# Altium PCB PCB_Add.PcbDoc
Units mm, origin at the board's own origin, x right, y up, seen from the top; angles counter-clockwise.
Board outline 29.72 x 33.27 mm, 2 copper layers (Top Layer, Bottom Layer); 13 components, 6 nets, 39 pads, 0 vias.
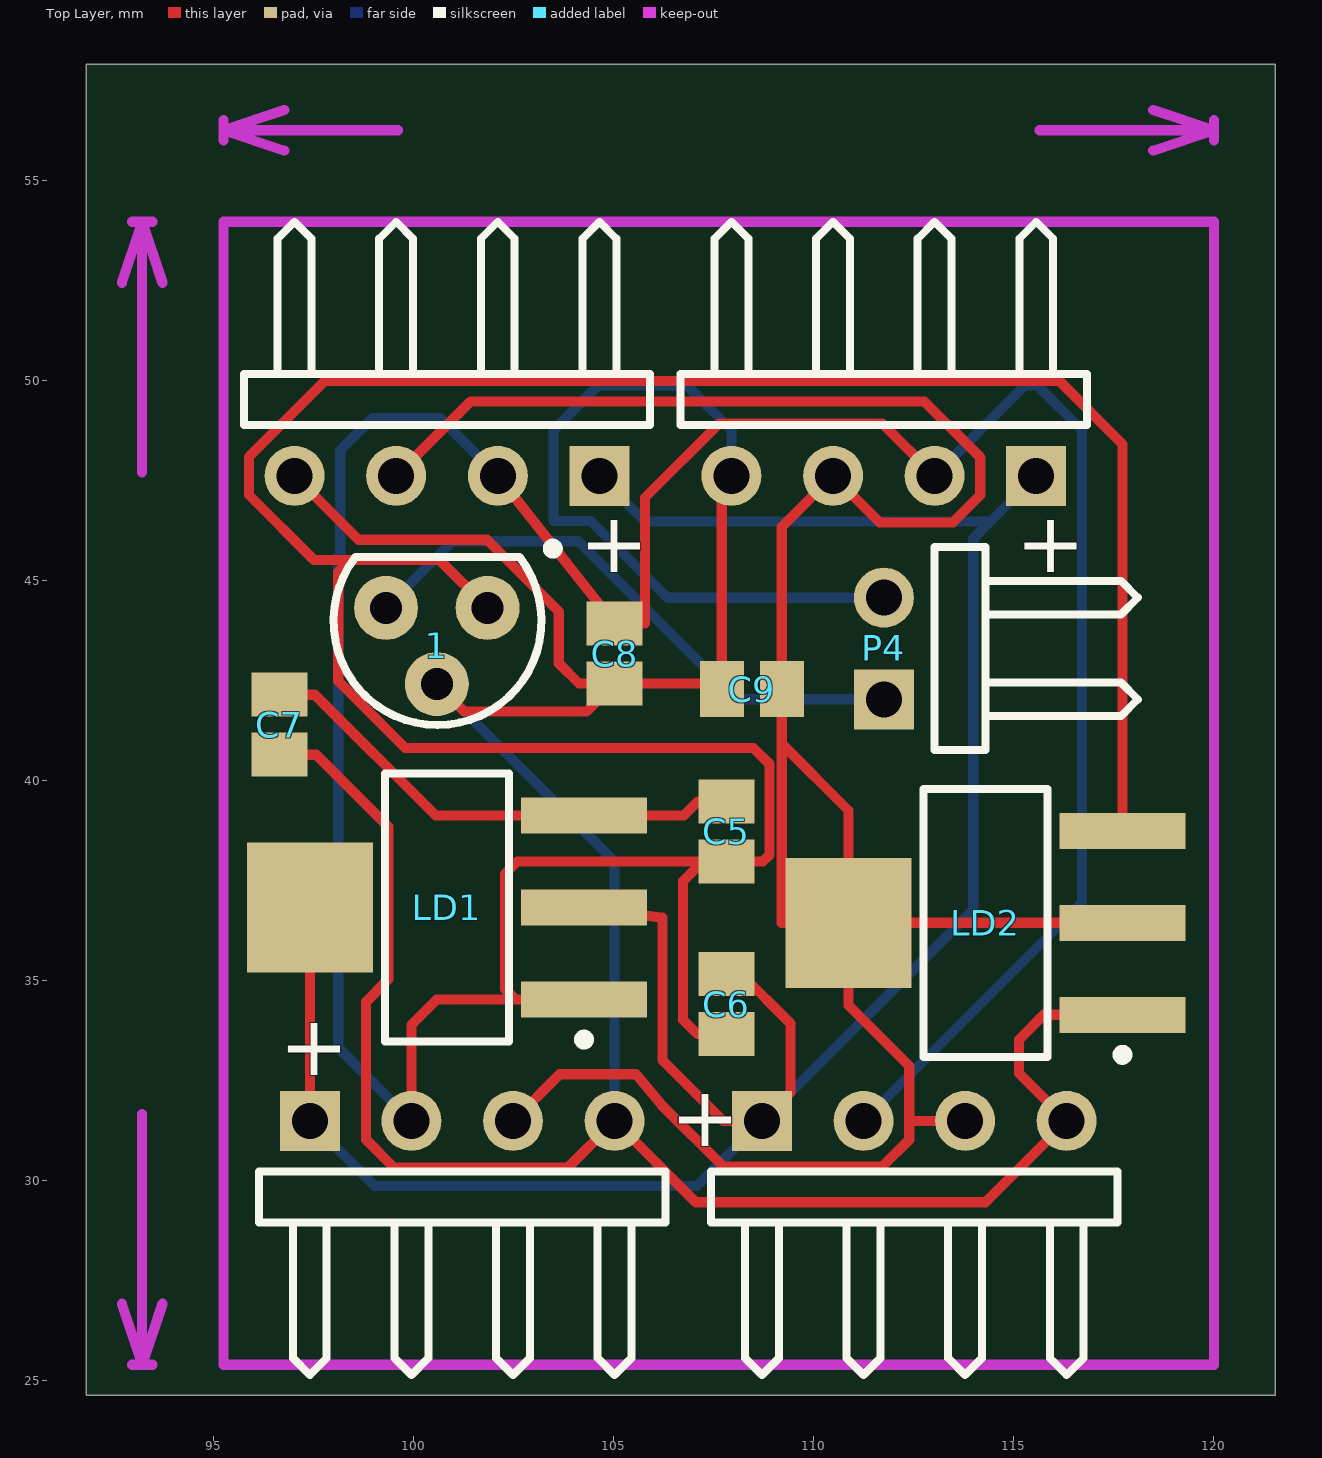
[diagram p0: Top Layer view]
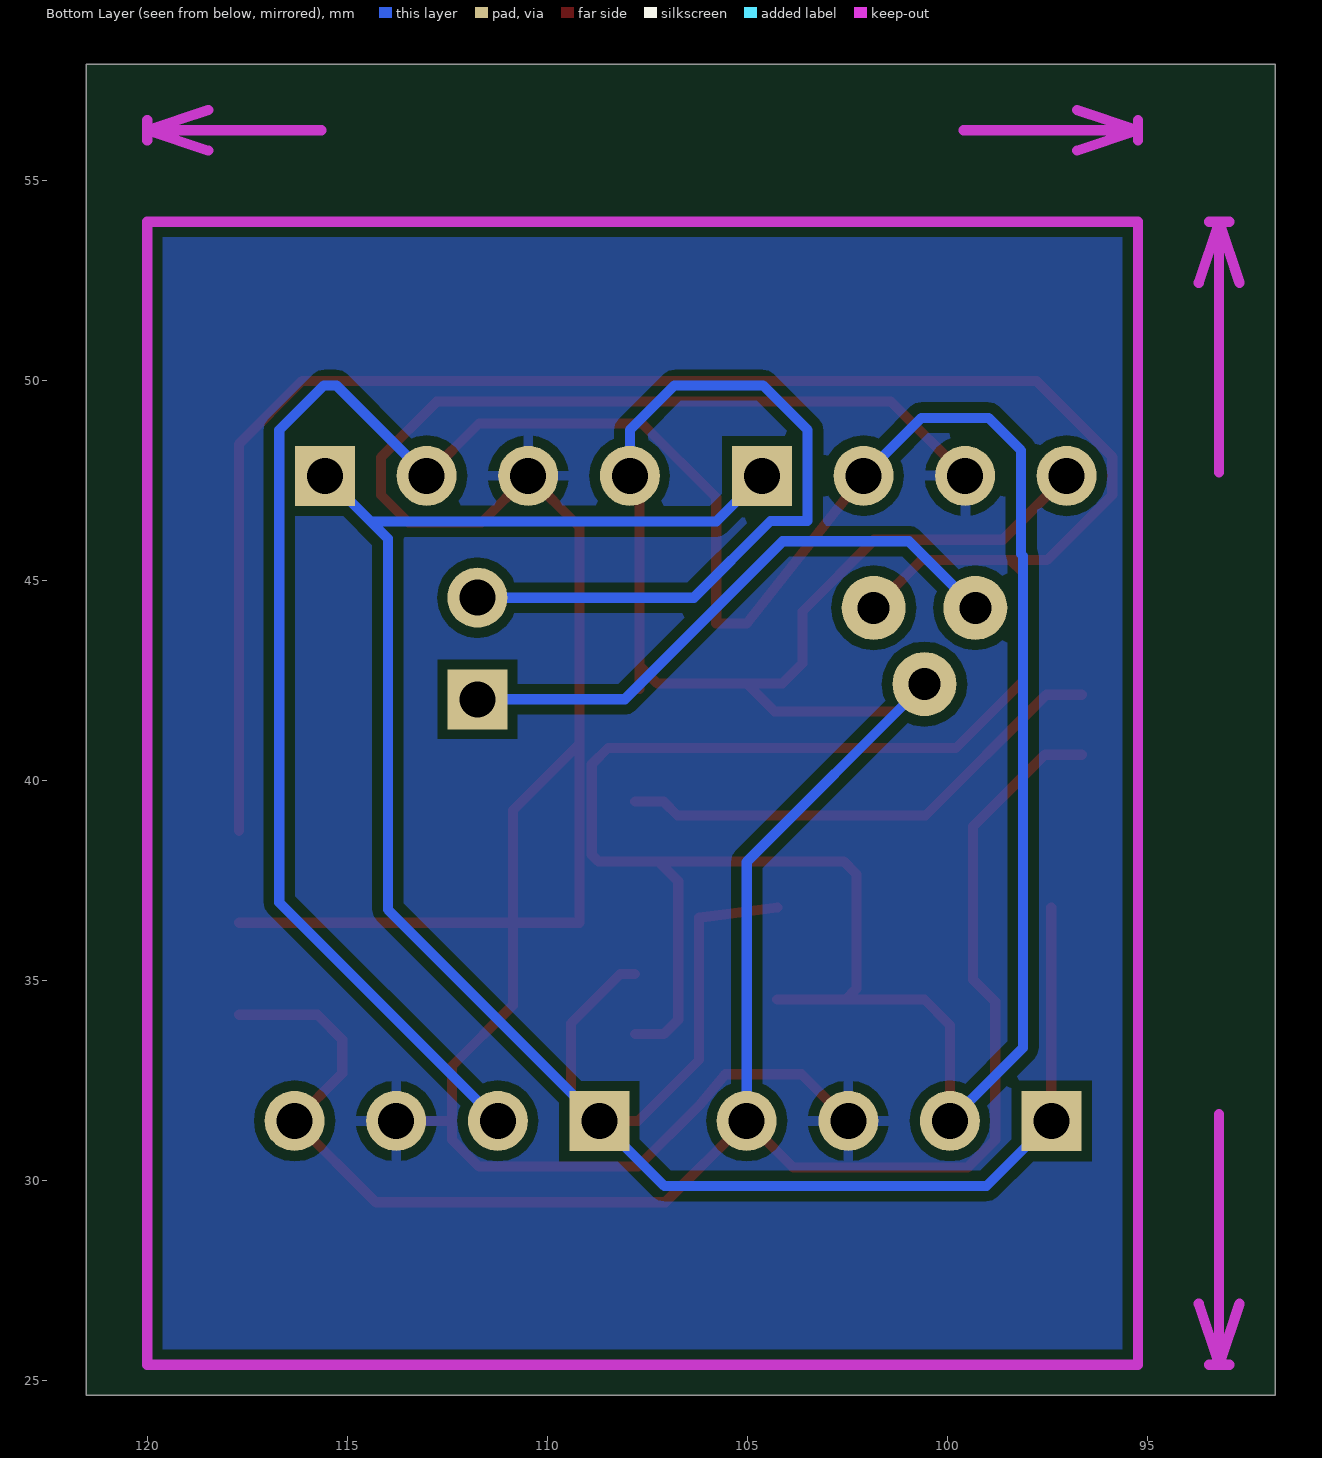
[diagram p1: Bottom Layer view, seen from below]

## Layer stack, top to bottom
Top Solder: solder mask 0.0102, Solder Resist, Dk 3.5
Top Layer: signal copper 0.0356
Dielectric 1: dielectric 0.32, FR-4, Dk 4.8
Bottom Layer: signal copper 0.0356
Bottom Solder: solder mask 0.0102, Solder Resist, Dk 3.5

## Board outline
91.821,24.638 91.821,57.912 121.539,57.912 121.539,24.638

## Design rules (kind name [scope] priority, off if disabled: settings)
Clearance [All] p1: gap=0.254
PolygonConnect [All] p1: connectstyle=Relief reliefconductorwidth=0.254 reliefentries=4 polygonreliefangle="90 Angle" airgapwidth=0.254
RoomDefinition Sch_Add [InComponentClass('Sch_Add')] p1: confinementstyle=ConfineIn formatcopy=TRUE lockcomponents=FALSE outline 0,0 50.8,0 50.8,25.4 0,25.4
RoutingVias [All] p1: holewidth=0.711 width=1.27 viastyle="Through Hole" minholewidth=0.711 minwidth=1.27 maxholewidth=0.711 maxwidth=1.27
SolderMaskExpansion [All] p1: expansion=0.102
Width [All] p1: maxlimit=0.254 minlimit=0.254 preferedwidth=0.254
30 further rules are at their usual default settings.

## Components (designator, comment, footprint, x,y, rotation, side; value= is the part's Value field where it differs from the comment)
1 "7805" TO-92 100.457,43.942 r90 top
+ "Header 4H" HDR1X4H 108.712,31.496 r0 top (schematic designator P5)
+ "Header 4H" HDR1X4H 104.648,47.625 r180 top (schematic designator P9)
+ "Header 4H" HDR1X4H 97.409,31.496 r0 top (schematic designator P7)
+ "Header 4H" HDR1X4H 115.57,47.625 r180 top (schematic designator P8)
C5 "Cap Pol3" C0805 107.823,38.735 r270 top
C6 "Cap Pol3" C0805 107.823,34.417 r270 top
C7 "Cap Pol3" C0805 96.647,41.402 r270 top
C8 "Cap Pol3" C0805 105.029,43.18 r270 top
C9 "Cap Pol3" C0805 108.458,42.291 r180 top
LD1 "LD1117" SOT230P700X180-4N 100.838,36.83 r180 top
LD2 "LD1117" SOT230P700X180-4N 114.3,36.449 r180 top
P4 "Header 2H" HDR1X2H 111.76,42.037 r90 top

## Footprints (in the part's own frame and the unit in brackets; to place one, negate y for a bottom-side part, rotate by r counter-clockwise, add the part's x,y. Pads: shape width x height; smd on the part's side, far side on the other; paste and mask are expansions set on the pad)
C0805 [mm] "Chip Capacitor, Body 2.0x1.3mm, IPC High Density"
  rect 1.1x1.4 smd: 1(-0.75,0) 2(0.75,0)
  body extent -1.1,-0.72 1.1,0.72, height 1.4
HDR1X2H [mm] "Connector; Header; 2 Position; Right Angle"
  rect 1.5x1.5 hole 0.9: 1(0,0)
  round 1.5 hole 0.9: 2(2.54,0)
  silkscreen extent -1.27,-6.35 3.81,-1.27
HDR1X4H [mm] "Connector; Header; 4 Position; Right Angle"
  rect 1.5x1.5 hole 0.9: 1(0,0)
  round 1.5 hole 0.9: 2(2.54,0) 3(5.08,0) 4(7.62,0)
  silkscreen extent -1.27,-6.35 8.89,-1.27
SOT230P700X180-4N [mm] "SOT223, 4-Leads, Body 6.50x7.00mm (avg), Pitch 2.30mm, IPC Medium Density"
  rect 3.15x0.9 smd: 1(-3.425,2.3) 2(-3.425,0) 3(-3.425,-2.3)
  rect 3.15x3.25 smd: 4(3.425,0)
  silkscreen extent -3.55,-3.35 1.55,3.42, body extent -1.85,-3.35 1.85,3.35, height 1.8
TO-92 [mm]
  round 1.6 hole 0.8: 1(0.381,-1.397) 2(-1.524,-0.127) 3(0.381,1.143)
  silkscreen extent -2.55,-3.15 1.99,2.46, body extent -2.55,-2.75 1.65,2.47, height 5.2

## Part data
+ + + +: "Header, 4-Pin, Right Angle"
C5 C6 C7 C8 C9: "Polarized Capacitor (Surface Mount)"
P4: "Header, 2-Pin, Right Angle"

## Nets (pads, with @x,y where several pads share a name; then routed paths per layer and width w, separated by ;. In a path a pad name is that pad's centre, name@x,y a point inside that pad or via, vN(x,y) a via of type N, cw(c..) or ccw(c..) an arc to the next point about the centre after c; other vN are vias at no path point)
NetC5_1: C5.1 C7.1 LD1.3 | length 12.6
  Top Layer w0.254: C7.1 97.536,42.152 100.558,39.13 LD1.3 106.757,39.13 107.112,39.485 C5.1
P+2.5V: 1.1 +.2 C5.2 C6.2 C8.1 LD1.1 LD2.3 | length 188.7
  Top Layer w0.254: +.2@99.949,31.496 99.949,33.895 100.584,34.53 102.554,34.53 ; 1.1 100.66,45.517 ; +.2@102.108,47.625 C8.1 105.791,43.93 ; LD1.1 102.554,34.53 ; +.2@113.03,47.625 111.722,48.933 107.644,48.933 105.791,47.08 ; 95.891,48.097 97.791,49.997 ; 95.891,48.097 95.891,47.146 97.52,45.517 ; 95.891,48.097 97.791,49.997 ; 97.52,45.517 100.66,45.517 ; 97.52,45.517 98.425,45.517 ; 97.791,49.997 116.144,49.997 ; 97.791,49.997 116.144,49.997 ; 98.425,45.517 100.66,45.517 ; 98.425,45.517 98.12,45.212 98.12,42.494 99.797,40.818 108.498,40.818 108.904,40.411 108.904,38.152 108.737,37.985 C5.2 ; 102.554,34.53 102.286,34.798 102.286,37.668 102.603,37.985 C5.2@107.239,37.985 ; 105.791,43.93 105.791,47.08 ; 105.791,43.93 105.791,47.08 ; 106.741,34.026 106.741,37.487 ; 106.741,34.026 107.1,33.667 ; 106.741,34.026 106.741,37.487 ; 106.741,37.487 C5.2@107.239,37.985 ; 107.1,33.667 C6.2 107.1,33.667 ; C5.2@107.239,37.985 C5.2 ; C5.2@107.239,37.985 C5.2 ; 116.144,49.997 117.725,48.416 ; 116.144,49.997 117.725,48.416 ; 117.725,48.416 LD2.3 117.725,48.416
  Bottom Layer w0.254: +.2@99.949,31.496 98.12,33.325 98.12,45.618 98.171,45.669 98.171,48.26 98.984,49.073 100.66,49.073 +.2@102.108,47.625 ; +.2@111.252,31.496 116.713,36.957 116.713,48.768 115.595,49.886 115.291,49.886 +.2@113.03,47.625
P+5V: +.1 C6.1 LD1.2 LD1.4 | length 60.7
  Top Layer w0.254: +.1@97.409,31.496 97.413,31.5 LD1.4 ; LD1.2 106.223,36.576 106.223,33.02 107.747,31.496 108.712,31.496 109.423,32.207 109.423,33.934 108.191,35.167 C6.1
  Bottom Layer w0.254: +.1@97.409,31.496 99.035,29.87 107.086,29.87 108.712,31.496 113.995,36.779 113.995,46.05 114.427,46.482 ; +.1@104.648,47.625 105.791,46.482 114.427,46.482 ; +.1@115.57,47.625 114.427,46.482
P+9V: 1.3 P4.1 | length 14.8
  Bottom Layer w0.254: 1.3 100.977,45.986 104.128,45.986 108.077,42.037 P4.1
P-2.5V: 1.2 +.4 C7.2 C8.2 C9.2 LD2.1 P4.2 | length 92.3
  Top Layer w0.254: C7.2 97.574,40.652 99.373,38.853 99.373,35.035 98.817,34.478 98.817,31.024 99.513,30.328 103.861,30.328 105.029,31.496 107.061,29.464 114.3,29.464 116.332,31.496 115.138,32.69 115.138,33.528 115.759,34.149 LD2.1 ; +.4@97.028,47.625 98.628,46.025 101.841,46.025 103.632,44.233 103.632,42.938 104.14,42.43 C8.2 ; 1.2 101.272,41.73 104.329,41.73 C8.2 ; C9.2 C9.2@107.708,42.875 ; +.4@107.95,47.625 107.708,47.383 C9.2@107.708,42.875 ; C8.2 C9.2@107.263,42.43 ; C9.2@107.263,42.43 C9.2@107.708,42.875 ; C9.2@107.263,42.43 107.416,42.583 C9.2@107.708,42.875
  Bottom Layer w0.254: 1.2 105.029,37.973 +.4@105.029,31.496 ; +.4@107.95,47.625 107.95,48.768 106.832,49.886 104.623,49.886 103.505,48.768 103.505,46.494 104.433,46.494 106.35,44.577 P4.2
PGND: +.3 C9.1 LD2.2 LD2.4 | length 71.7
  Top Layer w0.254: +.3@99.568,47.625 101.422,49.479 112.776,49.479 114.171,48.084 114.171,47.144 113.484,46.457 111.658,46.457 110.49,47.625 109.208,46.343 C9.1 ; +.3@102.489,31.496 103.657,32.664 105.562,32.664 105.588,32.639 106.197,31.902 107.745,30.355 111.724,30.355 112.395,31.026 112.395,31.496 ; +.3@113.792,31.496 112.395,31.496 ; LD2.2 LD2.4 ; 109.208,36.449 C9.1 ; 109.208,36.449 109.208,40.924 ; 109.208,36.449 LD2.4 ; 109.208,40.924 C9.1 ; 109.208,40.924 110.875,39.257 LD2.4 ; LD2.4 110.875,34.388 112.395,32.868 112.395,31.496

## Polygon pours and split planes (outlines as drawn)
PGND on Bottom Layer "PGND" (solid, pour order 1): 95.377,25.527 119.888,25.527 119.888,53.848 95.377,53.848

## Keep-outs
Keep-Out Layer:
  lines w0.254: 92.71,26.924 93.218,25.4 ; 92.71,52.451 93.218,53.975 ; 92.964,25.4 93.472,25.4 ; 92.964,53.975 93.472,53.975 ; 93.218,31.664 93.218,25.4 ; 93.218,47.711 93.218,53.975 ; 93.726,26.924 93.218,25.4 ; 93.726,52.451 93.218,53.975 ; 95.25,56.007 95.25,56.515 ; 96.774,55.753 95.25,56.261 ; 96.774,56.769 95.25,56.261 ; 99.609,56.261 95.25,56.261 ; 115.656,56.261 120.015,56.261 ; 118.491,55.753 120.015,56.261 ; 118.491,56.769 120.015,56.261 ; 120.015,56.007 120.015,56.515 ; 95.25,25.4 95.25,53.975 120.015,53.975 120.015,25.4 95.25,25.4
  text "24.765 (mm)" at 99.863,55.347 h1.52
  text "28.575 (mm)" at 94.132,31.918 h1.52 r90

## Silkscreen, mask and mechanical layers (free items; w line width, h text height)
Mechanical 13:
  lines w0.254: 91.821,24.638 91.821,57.912 121.539,57.912 121.539,24.638 108.966,24.638 91.821,24.638